# Altium PCB SuperCapV3Power.PcbDoc
Units mm, origin at the board's own origin, x right, y up, seen from the top; angles counter-clockwise.
Board outline 60 x 75 mm, 2 copper layers (Top Layer, Bottom Layer); 68 components, 29 nets, 158 pads, 447 vias.
Unrouted connection lines stored in the file: 7.
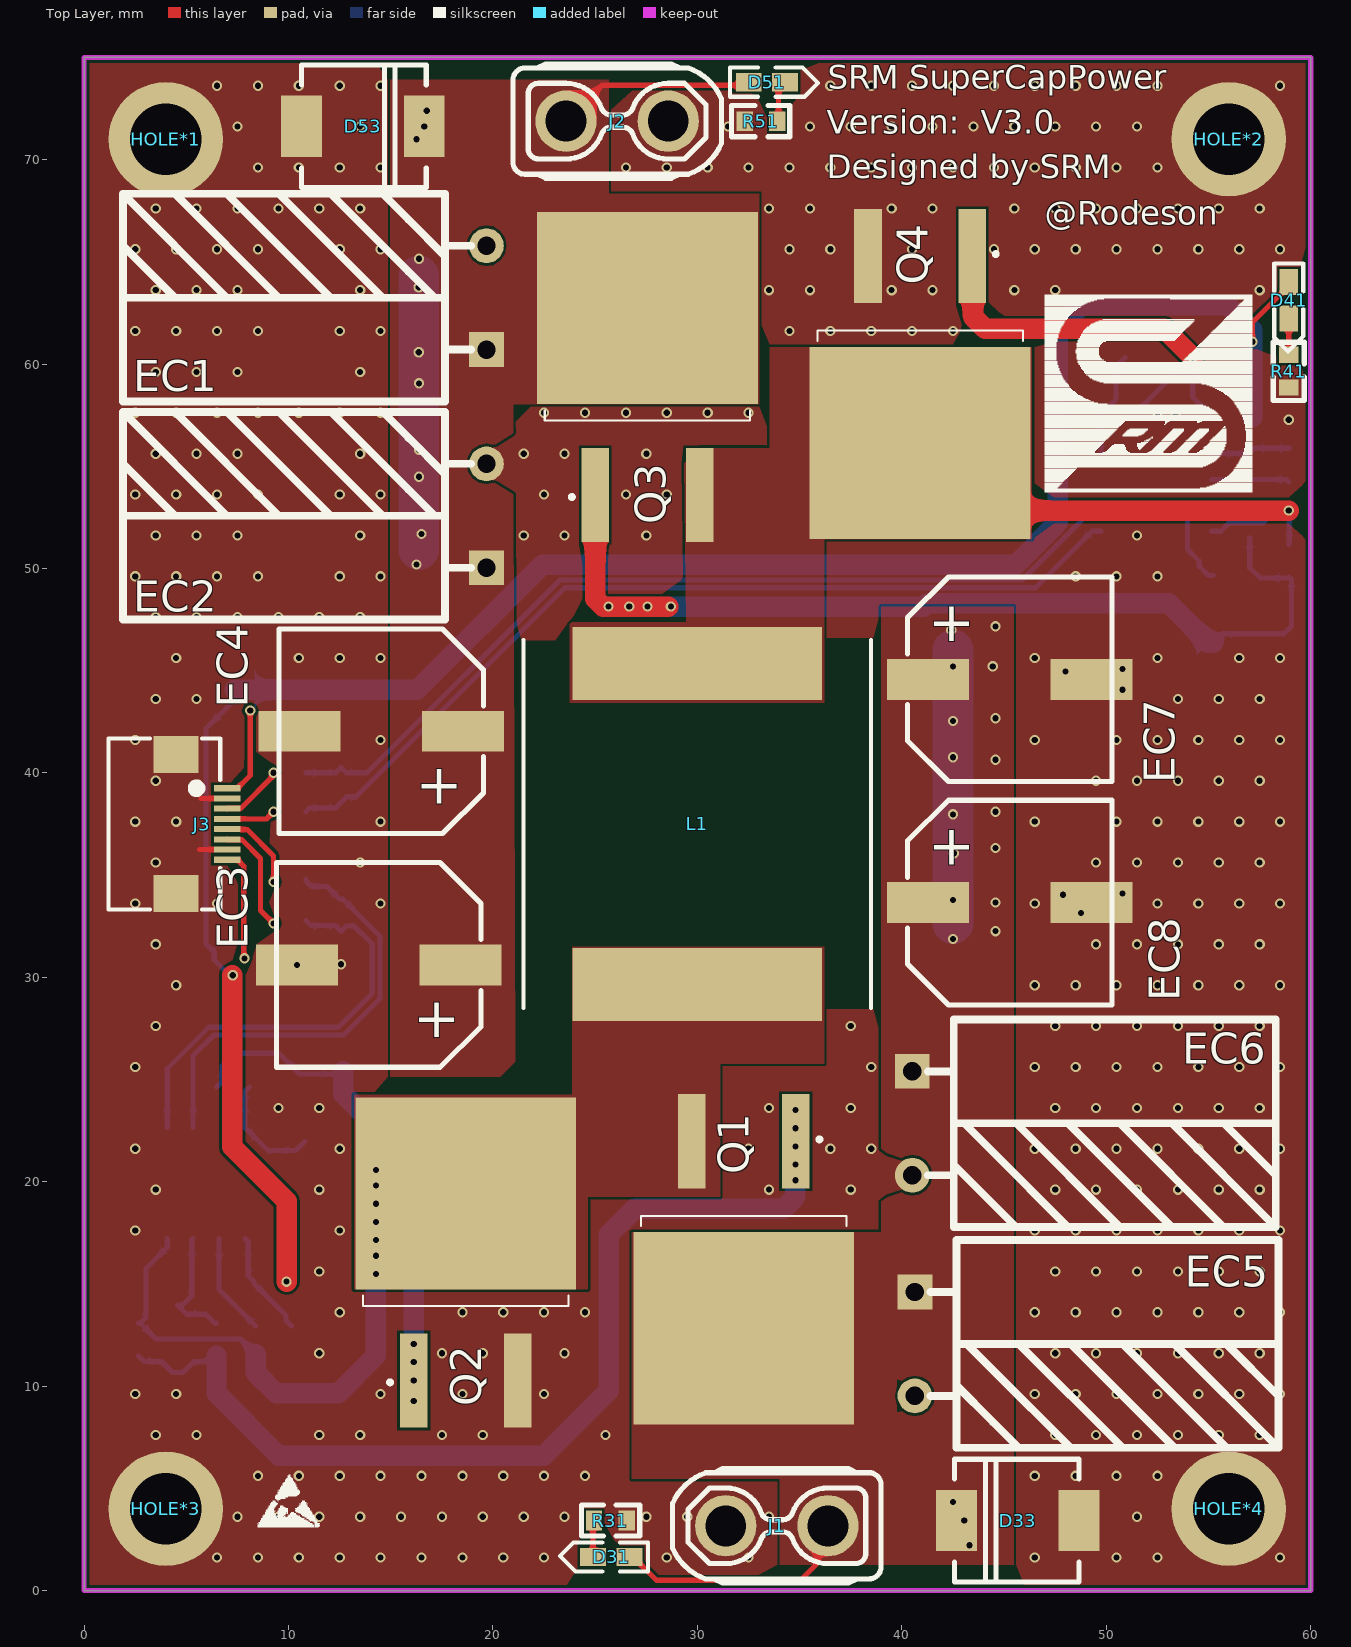
[diagram p0: Top Layer view]
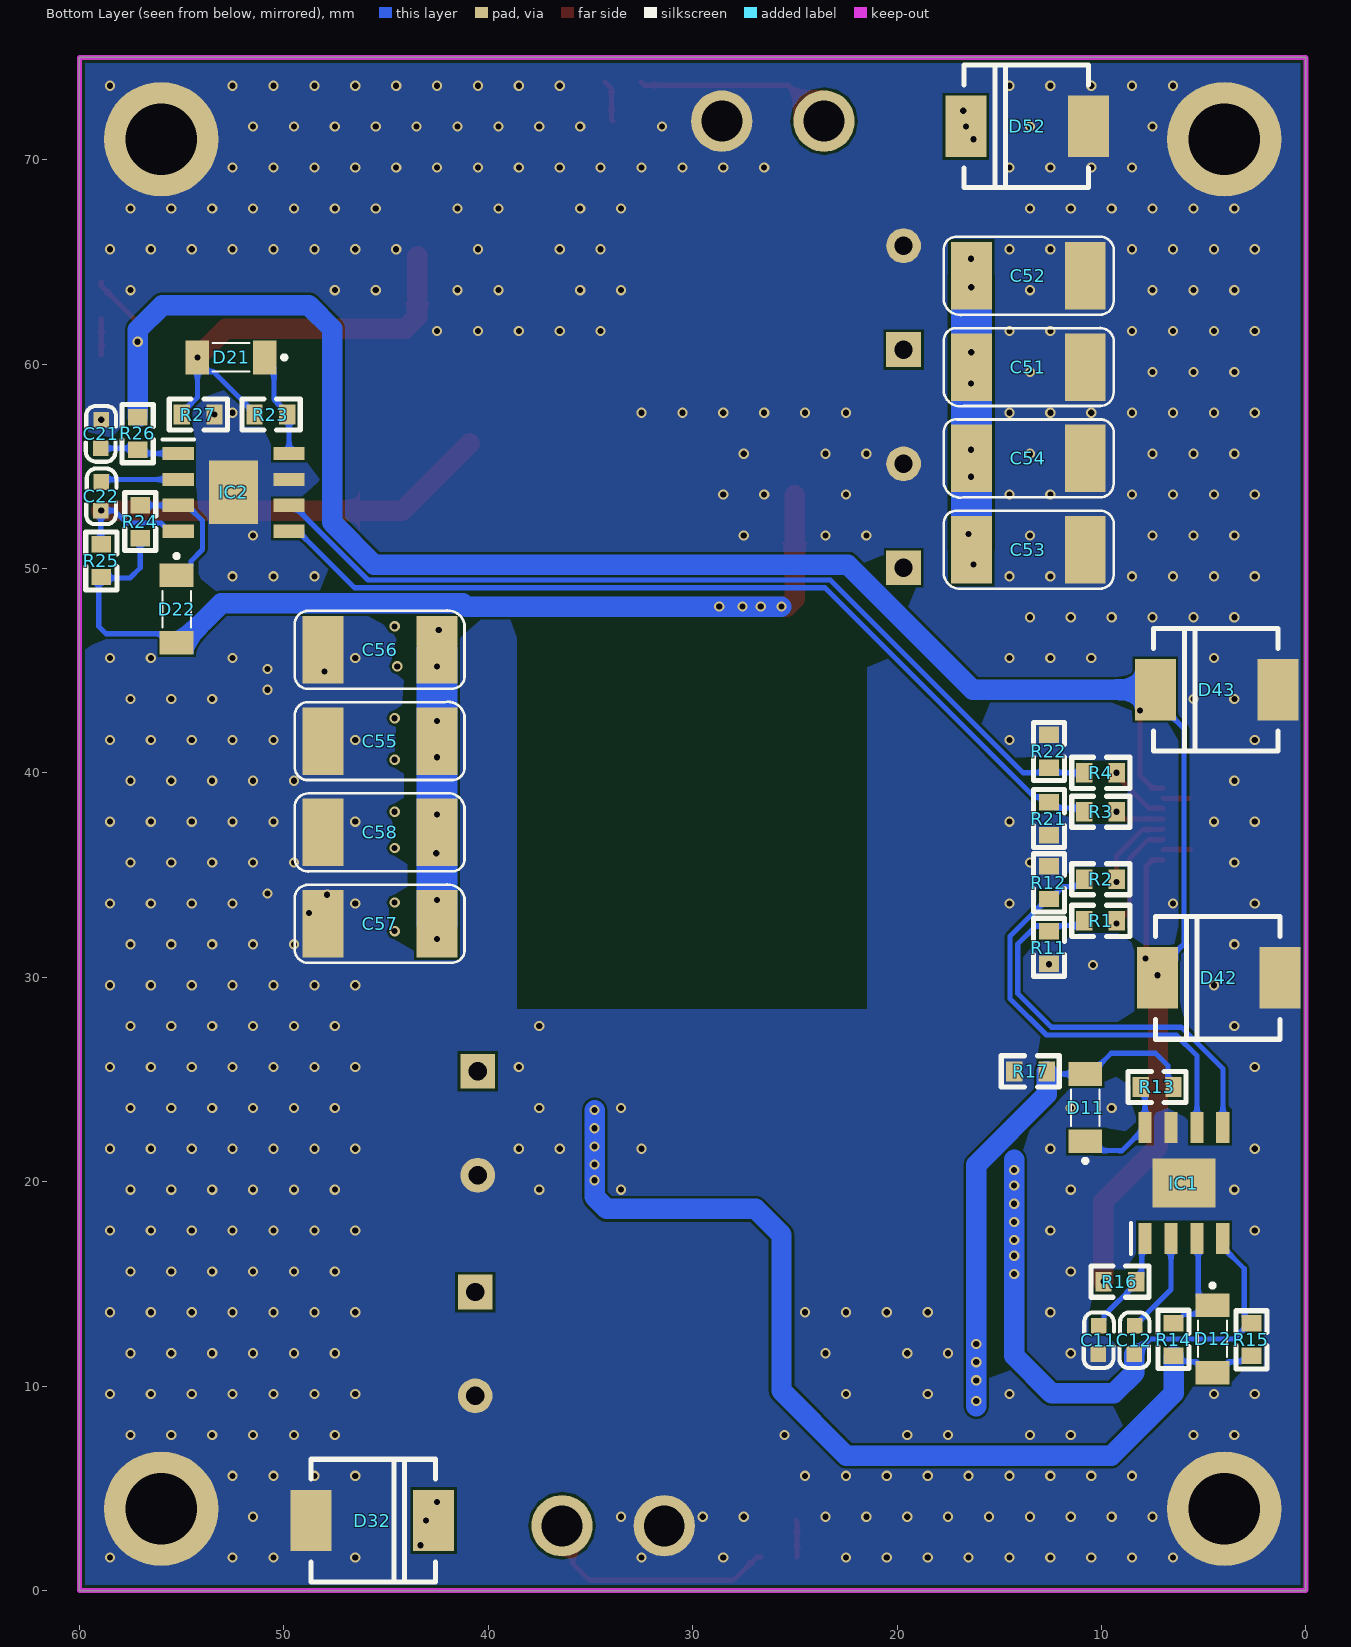
[diagram p1: Bottom Layer view, seen from below]
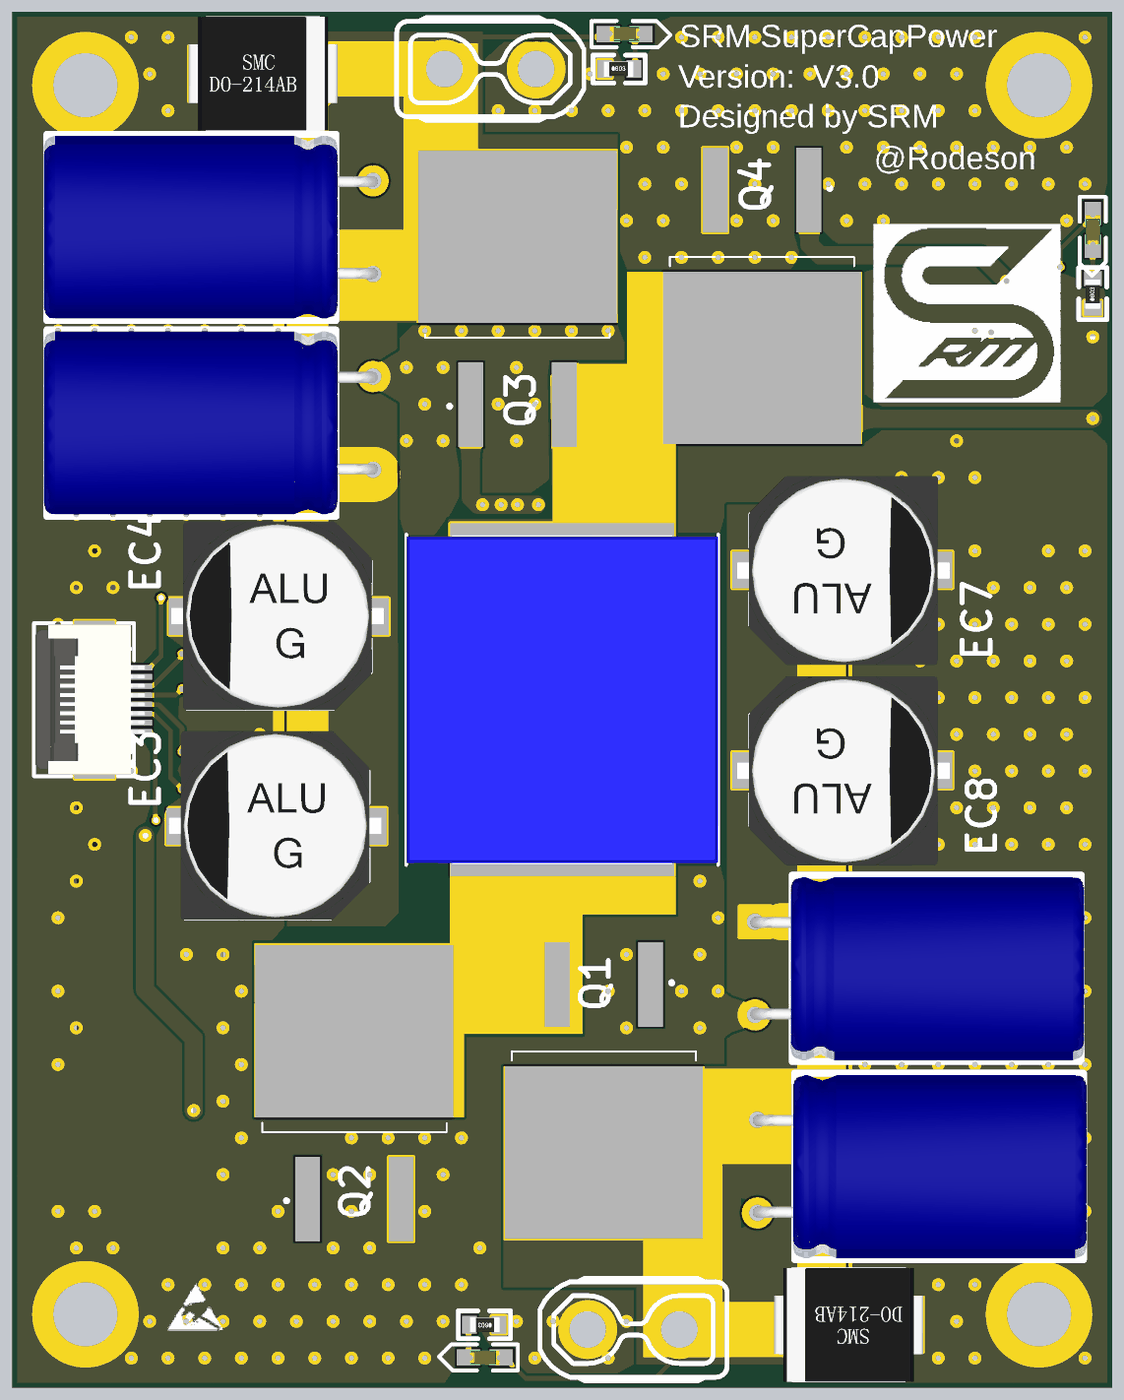
[diagram p2: 3D render of the assembled board from above, using the file's embedded part models]
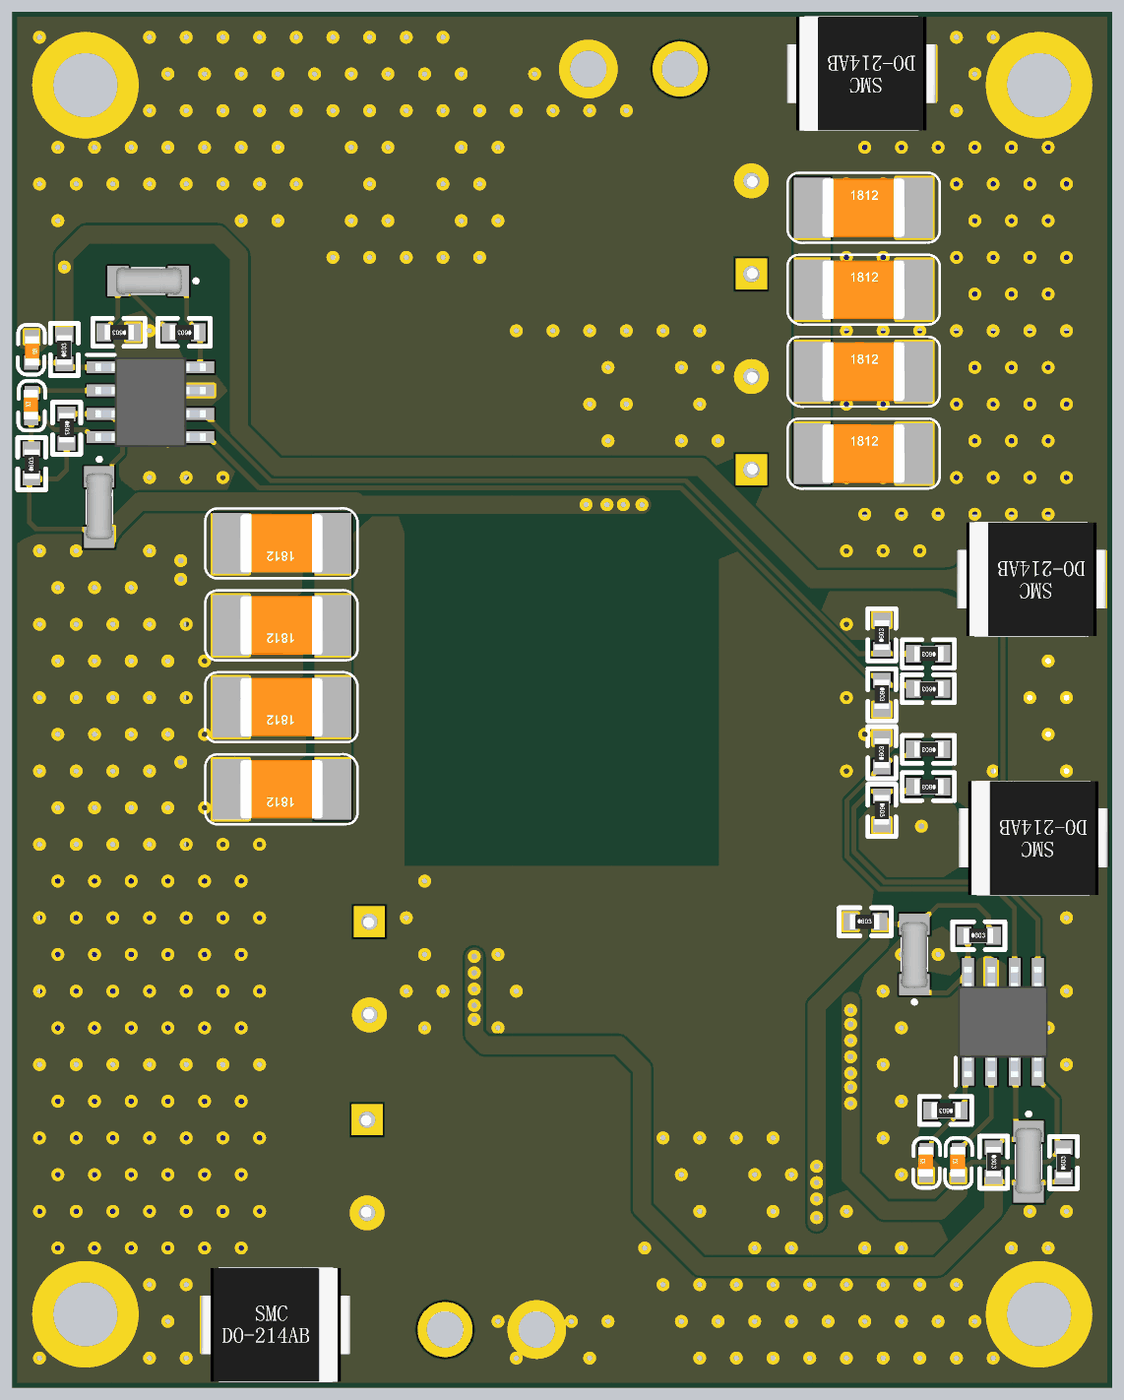
[diagram p3: 3D render of the assembled board from below, using the file's embedded part models]

## Layer stack, top to bottom
Top Solder: solder mask 0.0102, Solder Resist, Dk 3.5
Top Layer: signal copper 0.0356
Dielectric 1: dielectric 0.32, FR-4, Dk 4.8
Bottom Layer: signal copper 0.0356
Bottom Solder: solder mask 0.0102, Solder Resist, Dk 3.5

## Board outline
0,0 60,0 60,75 0,75

## Design rules (kind name [scope] priority, off if disabled: settings)
Clearance [All] p1: gap=0.127 ignorepadtopadclearanceinfootprint=FALSE except(0: Arc-Hole Track-Hole SMDPad-Hole THPad-Hole Via-Hole Fill-Hole Poly-Hole Region-Hole Text-Hole)
PolygonConnect PolygonConnect_11 [All vs IsNamedPolygon('Bottom Layer-GND')] p1: connectstyle=Direct reliefconductorwidth=0.254 reliefentries=4 polygonreliefangle="90 Angle" airgapwidth=0.254
PolygonConnect PolygonConnect_10 [All vs IsNamedPolygon('GND_L01_P024')] p2: connectstyle=Direct reliefconductorwidth=0.254 reliefentries=4 polygonreliefangle="90 Angle" airgapwidth=0.254
PolygonConnect PolygonConnect_9 [All vs IsNamedPolygon('Top Layer-GND')] p3: connectstyle=Direct reliefconductorwidth=0.254 reliefentries=4 polygonreliefangle="90 Angle" airgapwidth=0.254
PolygonConnect PolygonConnect_8 [All vs IsNamedPolygon('GND_L02_P020')] p4: connectstyle=Direct reliefconductorwidth=0.254 reliefentries=4 polygonreliefangle="90 Angle" airgapwidth=0.254
PolygonConnect PolygonConnect_7 [All vs IsNamedPolygon('NETC22_1_L01_P018')] p5: connectstyle=Direct reliefconductorwidth=0.254 reliefentries=4 polygonreliefangle="90 Angle" airgapwidth=0.254
PolygonConnect PolygonConnect_6 [All vs IsNamedPolygon('CAP_L01_P014')] p6: connectstyle=Direct reliefconductorwidth=0.254 reliefentries=4 polygonreliefangle="90 Angle" airgapwidth=0.254
PolygonConnect PolygonConnect_5 [All vs IsNamedPolygon('Top Layer-24V 1')] p7: connectstyle=Direct reliefconductorwidth=0.254 reliefentries=4 polygonreliefangle="90 Angle" airgapwidth=0.254
PolygonConnect PolygonConnect_4 [All vs IsNamedPolygon('NETC12_1_L01_P010')] p8: connectstyle=Direct reliefconductorwidth=0.254 reliefentries=4 polygonreliefangle="90 Angle" airgapwidth=0.254
PolygonConnect PolygonConnect_3 [All vs IsNamedPolygon('Top Layer-CAP')] p9: connectstyle=Direct reliefconductorwidth=0.254 reliefentries=4 polygonreliefangle="90 Angle" airgapwidth=0.254
PolygonConnect PolygonConnect_2 [All vs IsNamedPolygon('Top Layer-24V')] p10: connectstyle=Direct reliefconductorwidth=0.254 reliefentries=4 polygonreliefangle="90 Angle" airgapwidth=0.254
PolygonConnect PolygonConnect_1 [All vs IsNamedPolygon('Top Layer-12V')] p11: connectstyle=Direct reliefconductorwidth=0.254 reliefentries=4 polygonreliefangle="90 Angle" airgapwidth=0.254
PolygonConnect [All] p12: connectstyle=Relief reliefconductorwidth=0.254 reliefentries=4 polygonreliefangle="90 Angle" airgapwidth=0.254
RoutingVias [All] p1: holewidth=0.711 width=1.27 viastyle="Through Hole" minholewidth=0.3 minwidth=0.5 maxholewidth=0.711 maxwidth=1.27
SilkToSilkClearance [All] p1: silktosilkclearance=0
SilkToSolderMaskClearance [IsPad] p1: minsilkscreentomaskgap=0 clearancetoexposedcopper=TRUE
SolderMaskExpansion [All] p1: expansion=0.102
Width [All] p1: maxlimit=5 minlimit=0.254 preferedwidth=0.254
28 further rules are at their usual default settings.

## Components (designator, comment, footprint, x,y, rotation, side; value= is the part's Value field where it differs from the comment)
C11 "0.1uF" 0603C 10.169,11.552 r90 bottom
C12 "1uF" 0603C 8.416,11.552 r90 bottom
C21 "0.1uF" 0603C 58.919,57.282 r270 bottom
C22 "1uF" 0603C 58.962,52.827 r90 bottom
C51 "47uF" 1812C 16.37,59.851 r270 bottom
C52 "47uF" 1812C 16.37,64.318 r270 bottom
C53 "47uF" 1812C 16.37,50.917 r270 bottom
C54 "47uF" 1812C 16.37,55.384 r270 bottom
C55 "47uF" 1812C 42.507,41.556 r90 bottom
C56 "47uF" 1812C 42.507,46.023 r90 bottom
C57 "47uF" 1812C 42.507,32.622 r90 bottom
C58 "47uF" 1812C 42.507,37.089 r90 bottom
D11 "LL4148" FDLL4448 10.795,23.621 r90 bottom
D12 "LL4148" FDLL4448 4.572,12.319 r270 bottom
D21 "LL4148" FDLL4448 52.578,60.325 r0 bottom
D22 "LL4148" FDLL4448 55.245,48.007 r270 bottom
D31 "LED" LED-0603G 26.67,1.651 r180 top
D32 "SMBJ28A" SMC/DO-214AB 48.672,3.429 r180 bottom
D33 "SMBJ28A" SMC/DO-214AB 48.672,3.429 r180 top
D41 "LED" LED-0603G 58.921,64.008 r270 top
D42 "SMBJ28A" SMC/DO-214AB 1.27,29.972 r0 bottom
D43 "SMBJ28A" SMC/DO-214AB 1.366,44.069 r0 bottom
D51 "LED" LED-0603G 32.512,73.78 r0 top
D52 "SMBJ28A" SMC/DO-214AB 10.637,71.628 r0 bottom
D53 "SMBJ28A" SMC/DO-214AB 10.637,71.628 r0 top
EC1 "470uF" DIP-EC5.0X10X16-A 19.685,60.706 r180 top
EC2 "470uF" DIP-EC5.0X10X16-A 19.685,50.038 r180 top
EC3 "47uF" SMD-EC10X10X10 10.414,30.607 r0 top
EC4 "47uF" SMD-EC10X10X10 10.541,42.037 r0 top
EC5 "470uF" DIP-EC5.0X10X16-A 40.64,14.605 r0 top
EC6 "470uF" DIP-EC5.0X10X16-A 40.513,25.4 r0 top
EC7 "47uF" SMD-EC10X10X10 49.276,44.577 r180 top
EC8 "47uF" SMD-EC10X10X10 49.276,33.655 r180 top
HOLE*1 "Hole" M3#1 3.175,71.882 r90 top
HOLE*2 "Hole" M3#2 57,72 r90 top
HOLE*3 "Hole" M3#3 3.302,3.169 r90 top
HOLE*4 "Hole" M3#4 56.896,3.169 r90 top
IC1 "UCC27211DDAR" SOIC127P600X170-9N 5.969,19.939 r90 bottom
IC2 "UCC27211DDAR" SOIC127P600X170-9N 52.451,53.721 r180 bottom
J1 "XT30UPB-F" XT30UPB-F 31.369,3.175 r180 top
J2 "XT30UPB-F" XT30UPB-F 28.595,71.876 r0 top
J3 "FPC0.5-8P" FPC0.5-8P 4.5,37.5 r270 top
L1 "22uH" INDPM180170X700N 30,37.5 r270 top
Q1 "IRF3205ZSTRLPBF" IDB30E60 32.268,15.667 r90 top
Q2 "IRF3205ZSTRLPBF" IDB30E60 18.669,16.596 r270 top
Q3 "IRF3205ZSTRLPBF" IDB30E60 27.559,59.903 r270 top
Q4 "IRF3205ZSTRLPBF" IDB30E60 40.894,58.969 r90 top
R1 "0" 0603R 9.248,32.766 r0 bottom
R2 "0" 0603R 9.248,34.798 r0 bottom
R3 "0" 0603R 9.248,38.1 r0 bottom
R4 "0" 0603R 9.248,40.005 r0 bottom
R11 "10K" 0603R 12.573,32.258 r270 bottom
R12 "10K" 0603R 12.573,33.833 r90 bottom
R13 "5.1" 0603R 8.077,24.638 r180 bottom
R14 "5.1" 0603R 6.477,13.081 r270 bottom
R15 "10K" 0603R 2.667,11.481 r90 bottom
R16 "0" 0603R 8.306,15.113 r0 bottom
R17 "10K" 0603R 14.275,25.398 r180 bottom
R21 "10K" 0603R 12.573,38.557 r270 bottom
R22 "10K" 0603R 12.573,40.259 r90 bottom
R23 "5.1" 0603R 49.835,57.531 r0 bottom
R24 "5.1" 0603R 57.023,53.086 r270 bottom
R25 "10K" 0603R 58.928,49.581 r90 bottom
R26 "0" 0603R 57.15,55.804 r90 bottom
R27 "10K" 0603R 53.391,57.531 r0 bottom
R31 "100K" 0603R 26.543,3.429 r180 top
R41 "50K" 0603R 58.928,58.852 r90 top
R51 "100K" 0603R 32.309,71.882 r0 top

## Footprints (in the part's own frame and the unit in brackets; to place one, negate y for a bottom-side part, rotate by r counter-clockwise, add the part's x,y. Pads: shape width x height; smd on the part's side, far side on the other; paste and mask are expansions set on the pad)
0603C [mil]
  rect 30x30 smd: 1(0.21,-0.35) 2(55.21,-1.35)
  silkscreen extent -26,-30 81,28, body extent -1,-15 62,16, height 12
0603R [mm]
  rect 0.8x0.965 smd: 1(0,0) 2(1.6,0)
  silkscreen extent -0.64,-0.76 2.21,0.76, body extent -0.04,-0.41 1.56,0.41, height 0.45
1812C [mm]
  rect 3.302x2 smd: 1(0,0) 2(0,5.572)
  silkscreen extent -1.91,-1.35 1.92,6.96, body extent -1.6,0.54 1.6,5.04, height 1.6
DIP-EC5.0X10X16-A [mm]
  rect 1.7x1.7 hole 0.9: 1(0,0)
  round 1.7 hole 0.9: 2(0,-5.08)
  silkscreen extent 0.76,-7.62 17.78,2.54, body extent -0.25,-7.54 17.96,2.46, height 10.03
FDLL4448 [mm]
  rect 1.15x1.65 smd: 1(-1.65,0) 2(1.65,0)
  silkscreen extent -2.7,-0.7 0.9,0.7, body extent -1.84,-0.75 1.76,0.75, height 1.5
FPC0.5-8P [mm]
  rect 1.8x2.2 smd: 0(-3.4,0) 0(3.4,0)
  rect 0.3x1.3 smd: 1(-1.75,2.497) 2(-1.25,2.497) 3(-0.75,2.497) 4(-0.25,2.497) 5(0.25,2.497) 6(0.75,2.497) 7(1.25,2.497) 8(1.75,2.497)
  silkscreen extent -4.17,-3.3 4.17,2.16, body extent -4.11,-3.23 4.09,2.77, height 2
IDB30E60 [mm]
  rect 4.6x1.35 smd: 1(6.315,-2.55) 3(6.315,2.55)
  rect 9.4x10.8 smd: 2(-2.835,0)
  silkscreen extent 2.16,-5.02 6.5,5.02
INDPM180170X700N [mm]
  rect 3.55x12.2 smd: 1(-7.85,0) 2(7.85,0)
  silkscreen extent -9,-8.5 9,8.5, body extent -9,-8.5 9,8.5, height 7
LED-0603G [mil]
  rect 50x35 smd: A(0,0.26) K(70,0.26)
  silkscreen extent -36,-28 134,28, body extent 4,-15 66,17, height 24
M3#1 [mm]
  round 5.6 hole 3.5: 1(-0.882,-0.825)
M3#2 [mm]
  round 5.6 hole 3.5: 1(-1,1)
M3#3 [mm]
  round 5.6 hole 3.5: 1(0.831,-0.698)
M3#4 [mm]
  round 5.6 hole 3.5: 1(0.831,0.896)
SMC/DO-214AB [mm] "塑封二极管"
  rect 2x3 smd: A(0,0) K(6,0)
  silkscreen extent 0,-3 6.1,3, body extent -1.01,-3.1 7.11,3.1, height 2.7
SMD-EC10X10X10 [mm]
  rect 4x2 smd: 1(8,0) 2(0,0)
  silkscreen extent -1,-5 9,5, body extent -1.86,-5.12 9.74,5.18, height 10.2
SOIC127P600X170-9N [mm]
  rect 1.525x0.65 smd: 1(-2.712,1.905) 2(-2.712,0.635) 3(-2.712,-0.635) 4(-2.712,-1.905) 5(2.712,-1.905) 6(2.712,-0.635) 7(2.712,0.635) 8(2.712,1.905)
  rect 2.4x3.1 smd: 9(0,0)
  silkscreen extent -3.47,2.58 -1.95,2.58, body extent -3,-2.45 3,2.45, height 1.7
XT30UPB-F [mm]
  round 3 hole 2: 1(-5.02,0.006) 2(-0.02,0.006)
  silkscreen extent -7.62,-2.79 2.58,2.81

## Part data
C11 C12 C21 C22 C51 C52 C53 C54 C55 C56 C57 C58: library part CAP, "无极性电容"
D11 D12 D21 D22: "Diode", Manufacturer_Name="ON Semiconductor", Mouser Part Number=512-LL4148, Arrow Part Number=LL4148, Arrow Price/Stock=https://www.arrow.com/en/products/ll4148/on-semiconductor?region=asia, Datasheet Link=https://www.onsemi.com/pub/Collateral/LL4148-D.pdf, Height=1mm, Manufacturer_Part_Number=LL4148, Mouser Price/Stock=https://www.mouser.co.uk/ProductDetail/ON-Semiconductor-Fairchild/LL4148?qs=z%2Fr5wmDnQfY5jXgsdLPkRg%3D%3D
D32 D33 D42 D43 D52 D53: library part "DIODE ZENER", "稳压二极管"
EC1 EC2 EC5 EC6: library part DIP_ECAP, "直插电解电容"
EC3 EC4 EC7 EC8: library part SMD_ECAP, "贴片电解电容"
IC1 IC2: "Integrated Circuit", Manufacturer_Name="Texas Instruments", Mouser Part Number=595-UCC27211DDAR, Arrow Part Number=UCC27211DDAR, Arrow Price/Stock=https://www.arrow.com/en/products/ucc27211ddar/texas-instruments, Datasheet Link=http://www.ti.com/lit/gpn/UCC27211, Height=1.7mm, Manufacturer_Part_Number=UCC27211DDAR, Mouser Price/Stock=https://www.mouser.co.uk/ProductDetail/Texas-Instruments/UCC27211DDAR?qs=o1A9MY8yOkUTp5ljYZfoNg%3D%3D
J3: "贴片"
L1: library part BCIHP1770-100M, "Inductor", Manufacturer_Name="BC(Bao Cheng Elec)", Datasheet Link=https://datasheet.lcsc.com/szlcsc/Bao-Cheng-Elec-BC-BCIHP1770-100M_C237980.pdf, Height=7mm, Manufacturer_Part_Number=BCIHP1770-100M
Q1 Q2 Q3 Q4: "MOSFET (N-Channel)", Manufacturer_Name=Infineon, Mouser Part Number=942-IRF3205ZSTRLPBF, Arrow Part Number=IRF3205ZSTRLPBF, Arrow Price/Stock=https://www.arrow.com/en/products/irf3205zstrlpbf/infineon-technologies-ag?region=nac, Datasheet Link=https://www.infineon.com/dgdl/irf3205zpbf.pdf?fileId=5546d462533600a4015355df030c190f, Manufacturer_Part_Number=IRF3205ZSTRLPBF, Mouser Price/Stock=https://www.mouser.co.uk/ProductDetail/Infineon-IR/IRF3205ZSTRLPBF?qs=2r01AXMCG3MP3VtI3Ve68w%3D%3D
R1 R2 R3 R4 R11 R12 R13 R14 R15 R16 R17 R21 R22 R23 R24 R25 R26 R27 R31 R41 R51: library part RES

## Via types
v1: diameter 0.5, hole 0.3, Top Layer to Bottom Layer, 447 vias

## Nets (pads, with @x,y where several pads share a name; then routed paths per layer and width w, separated by ;. In a path a pad name is that pad's centre, name@x,y a point inside that pad or via, vN(x,y) a via of type N, cw(c..) or ccw(c..) an arc to the next point about the centre after c; other vN are vias at no path point)
12V: D41.A D42.K D43.K J3.1 J3.8 R16.2 R26.2 | length 112.9
  Top Layer w0.254: J3.1 7.497,39.25 8.125,39.878 v1(8.125,43.05) ; J3.8@7.02,35.727 J3.8 7.497,35.75 7.814,35.433 v1@7.814,30.928 ; v1(57.15,61.087) 57.15,62.039 58.928,63.817 D41.A
  Top Layer w1: v1@7.239,30.099 7.239,21.717 9.906,19.05 v1(9.906,15.113)
  Bottom Layer w0.254: D42.K@7.175,30.035 6.366,30.845 6.366,31.233 5.969,31.63 5.969,42.172 7.366,43.569 D43.K ; D42.K@7.207,30.035 D42.K
  Bottom Layer w1: D43.K 16.303,44.069 22.424,50.19 45.568,50.19 47.625,52.247 47.625,61.722 48.768,62.865 55.956,62.865 57.15,61.671 v1(57.15,61.087) R26.2
  other v1: 7.27,30.099 7.845,30.928
24V: C55.1 C56.1 C57.1 C58.1 D31.A D32.K D33.K EC5.1 EC6.1 EC7.1 EC8.1 J1.1 Q1.2 | length 25.5
  Top Layer w0.254: D31.A 26.86,1.644 27.997,0.508 35.052,0.508 35.863,1.319 35.863,2.644 J1.1
  Bottom Layer w2: C57.1 C58.1 C55.1 C56.1
  other v1: 43.307,2.216 43.053,3.429 42.507,4.342 42.507,31.877 44.577,32.258 44.577,33.655 42.507,33.782 42.545,36.068 44.577,36.322 42.507,37.973 44.577,38.1 44.577,40.64 42.507,40.767 42.507,42.545 44.577,42.672 42.507,45.212 44.45,45.212 42.418,46.99 44.577,47.168
CAP: C51.1 C52.1 C53.1 C54.1 D51.A D52.K D53.K EC1.1 EC2.1 EC3.1 EC4.1 J2.1 Q3.2 | length 23.1
  Top Layer w0.254: J2.1 25.329,73.636 32.361,73.636 D51.A
  Bottom Layer w2: C53.1 C54.1 C51.1 v1(16.37,60.579) v1(16.37,63.754) C52.1
  other v1: 16.256,50.19 16.51,51.689 16.383,54.483 16.383,55.804 16.383,59.055 16.383,65.151 16.256,70.993 16.637,71.628 16.764,72.39
GND: C11.1 C21.1 C51.2 C52.2 C53.2 C54.2 C55.2 C56.2 C57.2 C58.2 D32.A D33.A D42.A D43.A D52.A D53.A EC1.2 EC2.2 EC3.2 EC4.2 EC5.2 EC6.2 EC7.2 EC8.2 HOLE*1.1 HOLE*2.1 HOLE*3.1 HOLE*4.1 IC1.7 IC1.9 IC2.7 IC2.9 J1.2 J2.2 J3.0 J3.2 J3.7 Q2.3 Q4.3 R11.2 R12.2 R17.1 R21.2 R22.2 R27.1 R31.1 R41.1 R51.1 | length 2.6
  Top Layer w0.254: 5.643,36.25 J3.7 ; 5.73,38.75 J3.2
  other v1: 6.504,1.614 8.504,1.614 10.504,1.614 12.504,1.614 14.504,1.614 16.504,1.614 18.504,1.614 20.504,1.614 22.504,1.614 28.504,1.614 32.504,1.614 46.504,1.614 50.504,1.614 52.504,1.614 58.504,1.614 7.504,3.614 9.504,3.614 11.504,3.614 13.504,3.614 15.504,3.614 17.504,3.614 19.504,3.614 21.504,3.614 23.504,3.614 27.504,3.614 29.504,3.614 33.504,3.614 51.504,3.614 8.504,5.614 10.504,5.614 12.504,5.614 14.504,5.614 16.504,5.614 18.504,5.614 20.504,5.614 22.504,5.614 24.504,5.614 46.504,5.614 48.504,5.614 50.504,5.614 52.504,5.614 3.504,7.614 5.504,7.614 11.504,7.614 13.504,7.614 17.504,7.614 19.504,7.614 25.504,7.614 47.504,7.614 49.504,7.614 51.504,7.614 53.504,7.614 55.504,7.614 57.504,7.614 2.504,9.614 4.504,9.614 14.504,9.614 18.504,9.614 22.504,9.614 46.504,9.614 48.504,9.614 50.504,9.614 52.504,9.614 54.504,9.614 56.504,9.614 58.504,9.614 11.504,11.614 17.504,11.614 19.504,11.614 23.504,11.614 47.504,11.614 49.504,11.614 51.504,11.614 53.504,11.614 55.504,11.614 57.504,11.614 12.504,13.614 18.504,13.614 20.504,13.614 22.504,13.614 24.504,13.614 46.504,13.614 48.504,13.614 50.504,13.614 52.504,13.614 54.504,13.614 56.504,13.614 58.504,13.614 11.504,15.614 47.504,15.614 49.504,15.614 51.504,15.614 53.504,15.614 55.504,15.614 57.504,15.614 2.504,17.614 12.504,17.614 46.504,17.614 48.504,17.614 50.504,17.614 52.504,17.614 54.504,17.614 56.504,17.614 58.504,17.614 3.504,19.614 11.504,19.614 33.504,19.614 37.504,19.614 47.504,19.614 49.504,19.614 51.504,19.614 53.504,19.614 55.504,19.614 57.504,19.614 2.504,21.614 12.504,21.614 32.504,21.614 36.504,21.614 38.504,21.614 46.504,21.614 48.504,21.614 50.504,21.614 52.504,21.614 54.504,21.614 56.504,21.614 58.504,21.614 9.504,23.614 11.504,23.614 33.504,23.614 37.504,23.614 47.504,23.614 49.504,23.614 51.504,23.614 53.504,23.614 55.504,23.614 57.504,23.614 2.504,25.614 38.504,25.614 46.504,25.614 48.504,25.614 50.504,25.614 52.504,25.614 54.504,25.614 56.504,25.614 58.504,25.614 3.504,27.614 37.504,27.614 47.504,27.614 49.504,27.614 51.504,27.614 53.504,27.614 55.504,27.614 57.504,27.614 4.504,29.614 46.504,29.614 48.504,29.614 50.504,29.614 52.504,29.614 54.504,29.614 56.504,29.614 58.504,29.614 10.414,30.607 12.573,30.639 3.504,31.614 49.504,31.614 51.504,31.614 53.504,31.614 55.504,31.614 57.504,31.614 48.768,33.147 2.504,33.614 6.504,33.614 14.504,33.614 46.504,33.614 52.504,33.614 54.504,33.614 56.504,33.614 58.504,33.614 47.879,34.036 50.8,34.1 3.504,35.614 13.504,35.614 49.504,35.614 51.504,35.614 53.504,35.614 55.504,35.614 57.504,35.614 2.504,37.614 4.504,37.614 14.504,37.614 46.504,37.614 50.504,37.614 52.504,37.614 54.504,37.614 56.504,37.614 58.504,37.614 3.504,39.614 49.504,39.614 51.504,39.614 53.504,39.614 55.504,39.614 57.504,39.614 2.504,41.614 14.504,41.614 46.504,41.614 50.504,41.614 52.504,41.614 54.504,41.614 56.504,41.614 58.504,41.614 3.504,43.614 5.504,43.614 53.504,43.614 55.504,43.614 57.504,43.614 50.8,44.069 48.006,44.958 50.8,45.085 4.504,45.614 10.504,45.614 12.504,45.614 14.504,45.614 46.504,45.614 52.504,45.614 56.504,45.614 58.504,45.614 3.504,47.614 5.504,47.614 7.504,47.614 9.504,47.614 11.504,47.614 13.504,47.614 2.504,49.614 4.504,49.614 6.504,49.614 8.504,49.614 12.504,49.614 14.504,49.614 48.504,49.614 50.504,49.614 52.504,49.614 3.504,51.614 5.504,51.614 7.504,51.614 13.504,51.614 21.504,51.614 23.504,51.614 27.504,51.614 51.504,51.614 2.504,53.614 4.504,53.614 6.504,53.614 8.504,53.614 12.504,53.614 14.504,53.614 22.504,53.614 26.504,53.614 28.504,53.614 3.504,55.614 5.504,55.614 7.504,55.614 13.504,55.614 21.504,55.614 23.504,55.614 27.504,55.614 58.928,57.277 53.391,57.531 2.504,57.614 4.504,57.614 6.504,57.614 8.504,57.614 10.504,57.614 12.504,57.614 14.504,57.614 22.504,57.614 24.504,57.614 26.504,57.614 28.504,57.614 30.504,57.614 32.504,57.614 52.504,57.614 3.504,59.614 5.504,59.614 7.504,59.614 13.504,59.614 2.504,61.614 4.504,61.614 6.504,61.614 8.504,61.614 12.504,61.614 14.504,61.614 34.504,61.614 36.504,61.614 38.504,61.614 40.504,61.614 42.504,61.614 3.504,63.614 5.504,63.614 7.504,63.614 13.504,63.614 33.504,63.614 35.504,63.614 39.504,63.614 41.504,63.614 45.504,63.614 47.504,63.614 57.504,63.614 2.504,65.614 4.504,65.614 6.504,65.614 8.504,65.614 12.504,65.614 14.504,65.614 34.504,65.614 36.504,65.614 40.504,65.614 44.504,65.614 46.504,65.614 48.504,65.614 50.504,65.614 52.504,65.614 54.504,65.614 56.504,65.614 58.504,65.614 3.504,67.614 5.504,67.614 7.504,67.614 9.504,67.614 11.504,67.614 13.504,67.614 33.504,67.614 35.504,67.614 39.504,67.614 41.504,67.614 45.504,67.614 47.504,67.614 49.504,67.614 51.504,67.614 53.504,67.614 55.504,67.614 57.504,67.614 8.504,69.614 10.504,69.614 12.504,69.614 14.504,69.614 26.504,69.614 28.504,69.614 30.504,69.614 32.504,69.614 34.504,69.614 36.504,69.614 38.504,69.614 40.504,69.614 42.504,69.614 44.504,69.614 46.504,69.614 48.504,69.614 50.504,69.614 52.504,69.614 7.504,71.614 13.504,71.614 31.504,71.614 35.504,71.614 37.504,71.614 39.504,71.614 41.504,71.614 43.504,71.614 45.504,71.614 47.504,71.614 49.504,71.614 51.504,71.614 6.504,73.614 8.504,73.614 10.504,73.614 12.504,73.614 14.504,73.614 36.504,73.614 38.504,73.614 40.504,73.614 42.504,73.614 44.504,73.614 46.504,73.614 48.504,73.614 50.504,73.614 52.504,73.614 58.504,73.614
NetC11_2: C11.2 IC1.1 R16.1 | length 5.2
  Bottom Layer w0.254: IC1.1 8.033,17.068 8.033,15.386 R16.1 8.306,15.031 9.881,13.456 9.881,13.208 C11.2
NetC12_1: C12.1 IC1.4 L1.2 Q1.3 Q2.2 R15.2 | length 28.6
  Bottom Layer w0.254: R15.2 R15.2@2.749,13.081 ; IC1.4 4.064,16.789 3.022,15.748 3.022,13.354 R15.2@2.749,13.081 ; C12.1 7.655,12.31 3.521,12.31 R15.2@2.749,13.081
  Bottom Layer w1: C12.1 8.407,10.645 9.4,9.652 12.446,9.652 14.275,11.481 v1(14.275,16.383) 14.275,21.082
  other v1: 14.275,15.494 14.275,17.145 14.275,18.034 14.275,18.923 14.275,19.812 14.275,20.574
NetC12_2: C12.2 IC1.2 | length 5
  Bottom Layer w0.254: IC1.2 6.604,14.732 C12.2
NetC21_2: C21.2 IC2.1 R26.1 | length 3.9
  Bottom Layer w0.254: IC2.1 56.972,55.626 R26.1 57.226,55.88 C21.2
NetC22_1: C22.1 IC2.4 L1.1 Q3.3 Q4.2 R25.2 | length 25.3
  Top Layer w1: Q4.2 44.196,52.832 v1(58.928,52.832)
  Bottom Layer w0.254: IC2.4 55.601,51.816 56.003,52.219 57.68,52.219 58.293,52.832 v1(58.928,52.832) C22.1 58.953,51.206 R25.2
NetC22_2: C22.2 IC2.2 | length 3.8
  Bottom Layer w0.254: IC2.2 58.801,54.356 C22.2
NetD11_1: D11.1 IC1.8 R13.1 | length 5.6
  Bottom Layer w0.254: R13.1 7.874,24.435 IC1.8 9.006,21.519 9.14,21.519 9.144,21.523 10.347,21.523 D11.1
NetD11_2: D11.2 Q2.1 R13.2 R17.2 | length 25.6
  Bottom Layer w0.254: R13.2 6.75,24.911 6.75,25.673 7.366,26.289 9.527,26.289 10.545,25.271 D11.2 12.548,25.271 R17.2
  Bottom Layer w1: R17.2 12.675,24.276 16.129,20.822 16.129,9.017
  other v1: 16.129,9.271 16.129,10.287 16.129,11.176 16.129,12.065
NetD12_1: D12.1 IC1.3 R14.1 | length 6
  Bottom Layer w0.254: IC1.3 5.27,17.163 5.27,14.417 4.822,13.969 D12.1 5.02,13.521 5.955,13.521 6.395,13.081 R14.1
NetD12_2: D12.2 Q1.1 R14.2 R15.1 | length 49.8
  Bottom Layer w0.254: R15.1 2.94,11.208 3.783,11.208 4.322,10.669 D12.2 4.822,10.669 5.361,11.208 6.204,11.208 R14.2
  Bottom Layer w1: R14.2 6.477,9.652 9.525,6.604 22.479,6.604 25.654,9.779 25.654,17.399 26.924,18.669 34.212,18.669 34.798,19.255 v1@34.798,23.495
  other v1: 34.798,20.077 34.798,20.839 34.798,21.728 34.798,22.617 34.798,23.506
NetD21_1: D21.1 IC2.8 R23.1 | length 5.2
  Bottom Layer w0.254: IC2.8 49.739,57.435 R23.1 49.835,57.613 50.48,58.258 50.48,59.877 D21.1
NetD21_2: D21.2 Q4.1 R23.2 R27.2 | length 21.6
  Top Layer w1: Q4.1 43.483,65.245 43.483,62.308 44.069,61.722 52.832,61.722 v1(54.229,60.325)
  Bottom Layer w0.254: R23.2 51.435,57.613 53.451,59.63 53.783,59.63 D21.2@54.228,60.075 ; v1(54.229,60.325) D21.2@54.228,60.075 ; R27.2 54.991,57.613 54.228,58.376 D21.2@54.228,60.075
NetD22_1: D22.1 IC2.3 R24.1 | length 6.7
  Bottom Layer w0.254: D22.1 54.995,49.657 54.547,50.105 54.547,50.355 53.975,50.927 53.975,52.335 54.726,53.086 IC2.3 R24.1
NetD22_2: D22.2 Q3.1 R24.2 R25.1 | length 49.5
  Top Layer w1: Q3.1 25.009,48.524 25.4,48.133 v1@28.575,48.133
  Bottom Layer w0.254: D22.2 55.693,46.805 58.692,46.805 59.055,47.168 59.055,49.454 R25.1 58.877,49.53 57.531,49.53 57.023,50.038 R24.2
  Bottom Layer w1: v1(25.654,48.133) 41.079,48.133 41.247,48.301 46.819,48.301 53.051,48.301 54.995,46.357 D22.2
  other v1: 26.67,48.133 27.559,48.133 28.702,48.133
NetD31_K: D31.K R31.2 | length 1.8
  Top Layer w0.254: D31.K 24.892,3.378 R31.2
NetD41_K: D41.K R41.2 | length 1.8
  Top Layer w0.254: R41.2 D41.K
NetD51_K: D51.K R51.2 | length 2.1
  Top Layer w0.254: R51.2 33.972,71.945 33.972,73.469 D51.K
NetJ3_3: J3.3 R4.1 | length 3.1
  Top Layer w0.254: J3.3 7.02,38.273 7.679,38.273 9.271,39.865 v1(9.271,40.005)
NetJ3_4: J3.4 R3.1 | length 2.4
  Top Layer w0.254: J3.4 8.921,37.75 v1(9.271,38.1)
NetJ3_5: J3.5 R2.1 | length 4.1
  Top Layer w0.254: J3.5 7.02,37.227 7.985,37.227 9.271,35.941 v1(9.271,34.671)
NetJ3_6: J3.6 R1.1 | length 5.5
  Top Layer w0.254: J3.6 7.02,36.727 7.723,36.727 8.636,35.814 8.636,33.274 v1(9.271,32.639)
TIM1_CH1: IC1.5 R1.2 R11.1 | length 20.8
  Bottom Layer w0.254: IC1.5 4.064,25.527 6.096,27.559 12.446,27.559 14.097,29.21 14.097,31.623 13.208,32.512 12.827,32.512 R11.1 12.3,32.531 11.083,32.531 R1.2
TIM1_CH2: IC1.6 R2.2 R12.1 | length 21.7
  Bottom Layer w0.254: IC1.6 5.334,26.162 6.35,27.178 12.7,27.178 14.478,28.956 14.478,32.011 12.655,33.833 R12.1 12.491,33.833 11.881,34.443 11.121,34.443 10.848,34.716 R2.2
TIM1_CH3: IC2.5 R3.2 R21.1 | length 44.6
  Bottom Layer w0.254: R3.2 11.032,38.284 12.3,38.284 R21.1 12.846,38.83 13.303,38.83 23.528,49.055 46.541,49.055 49.301,51.816 IC2.5
TIM1_CH4: IC2.6 R4.2 R22.1 | length 44.5
  Bottom Layer w0.254: R4.2 12.319,40.005 R22.1 12.827,40.005 13.843,40.005 23.274,49.436 45.88,49.436 49.53,53.086 IC2.6

## Polygon pours and split planes (outlines as drawn)
GND on Bottom Layer "Bottom Layer-GND" (solid, remove dead copper, pour order 26): 0,0 60,0 60,75 0,75
CAP on Bottom Layer "Bottom Layer-CAP" (solid, remove dead copper, pour order 8): 23.876,31.496
no net on Bottom Layer "NONET_L02_P000" (solid, remove dead copper, pour order 0): 38.989,49.784
GND on Top Layer "Top Layer-GND" (solid, remove dead copper, pour order 24): 0,75 60,75 60,0 0,0
CAP on Top Layer "Top Layer-CAP" (solid, remove dead copper, pour order 6): 21.082,25.146 14.986,25.146 14.986,73.914 25.654,73.914 25.654,69.215 20.955,69.215
NetC22_1 on Top Layer "NETC22_1_L01_P018" (solid, remove dead copper, pour order 18): 29.337,55.88 33.528,55.88 33.528,60.833 46.355,60.833 46.355,51.435 36.195,51.435 36.195,43.434 23.749,43.434 23.749,47.263 23.857,47.371 29.464,47.371
CAP on Top Layer "CAP_L01_P014" (solid, remove dead copper, pour order 14): 25.654,73.914 25.654,68.326 33.02,68.326 33.02,58.039 20.066,58.039 20.066,73.914
24V on Top Layer "Top Layer-24V 1" (solid, remove dead copper, pour order 12): 26.797,17.526 39.751,17.526 39.751,1.27 34.036,1.27 34.036,5.461 26.797,5.461
NetC12_1 on Top Layer "NETC12_1_L01_P010" (solid, remove dead copper, pour order 10): 23.876,31.496 36.195,31.496 36.195,25.781 31.115,25.781 31.115,19.255 24.638,19.255 24.638,14.732 13.208,14.732 13.208,24.257 23.857,24.257 23.876,24.276
24V on Top Layer "Top Layer-24V" (solid, remove dead copper, pour order 4): 38.989,48.133 38.989,5.461 34.036,5.461 34.036,1.27 45.466,1.27 45.466,48.133

## Keep-outs
Keep-Out Layer:
  the board outline again, w0.254

## Other copper
Top Layer:
  pour cut-out: 21.336,46.482 21.463,46.355 21.463,28.448 23.876,28.448 23.876,31.496 36.195,31.496 36.195,28.448 38.608,28.448 38.608,46.609 36.195,46.609 36.195,43.434 23.749,43.434 23.622,43.561 23.622,46.482 22.098,46.482
Bottom Layer:
  pour cut-out: 36.195,31.496 23.876,31.496 23.876,28.448 36.195,28.448
  pour cut-out: 21.336,46.482 21.463,46.355 21.463,28.448 23.876,28.448 23.876,31.496 36.195,31.496 36.195,28.448 38.608,28.448 38.608,46.609 36.195,46.609 36.195,43.434 23.749,43.434 23.622,43.561 23.622,46.482 22.098,46.482

## Silkscreen, mask and mechanical layers (free items; w line width, h text height)
Top Overlay:
  drawing of 3041 lines, arcs and shapes, not listed
  text "SRM SuperCapPower" at 36.389,73.076 h2
  text "Version:  V3.0" at 36.322,70.866 h2
  text "Designed by SRM" at 36.322,68.707 h2
  text "@Rodeson" at 46.99,66.421 h2
Top Solder:
  rectangle: 21.336,62.23 25.4,73.279
  rectangle: 34.417,1.651 38.735,12.7
  rectangle: 17.145,58.166 22.86,63.119
  rectangle: 37.719,12.192 45.72,17.399
  rectangle: 33.528,55.626 36.322,60.833
  rectangle: 29.464,46.863 36.195,55.804
  rectangle: 23.876,14.732 24.638,19.431
  rectangle: 23.876,19.304 31.115,25.908
  rectangle: 23.876,25.781 36.195,27.813
  lines w2: 41.91,25.4 43.942,25.4
  lines w3: 15.875,30.607 15.748,30.48 15.748,70.485 17.145,71.882 23.575,71.882 ; 15.875,60.706 19.685,60.706 ; 16.002,49.784 19.685,49.784 ; 36.389,3.169 42.793,3.169 44.323,4.699 44.323,17.78 ; 44.323,18.288 44.323,42.418 44.323,43.561 44.323,44.45
Mechanical 1:
  the board outline again, w0.254

## Text inside footprints (layer, text, board x,y; h text height)
EC3: Top Overlay "+" at 18.402,28.753 h2 r180
EC4: Top Overlay "+" at 18.529,40.183 h2 r180
EC7: Top Overlay "+" at 41.288,46.431 h2
EC8: Top Overlay "+" at 41.288,35.509 h2